# Altium PCB PCB_MCP2515_2022-08-01.pcbdoc
Units mil, origin at the board's own origin, x right, y up, seen from the top; angles counter-clockwise.
Board outline 3209.33 x 2315 mil, 2 copper layers (Top Layer, Bottom Layer); 14 components, 30 nets, 76 pads, 16 vias.
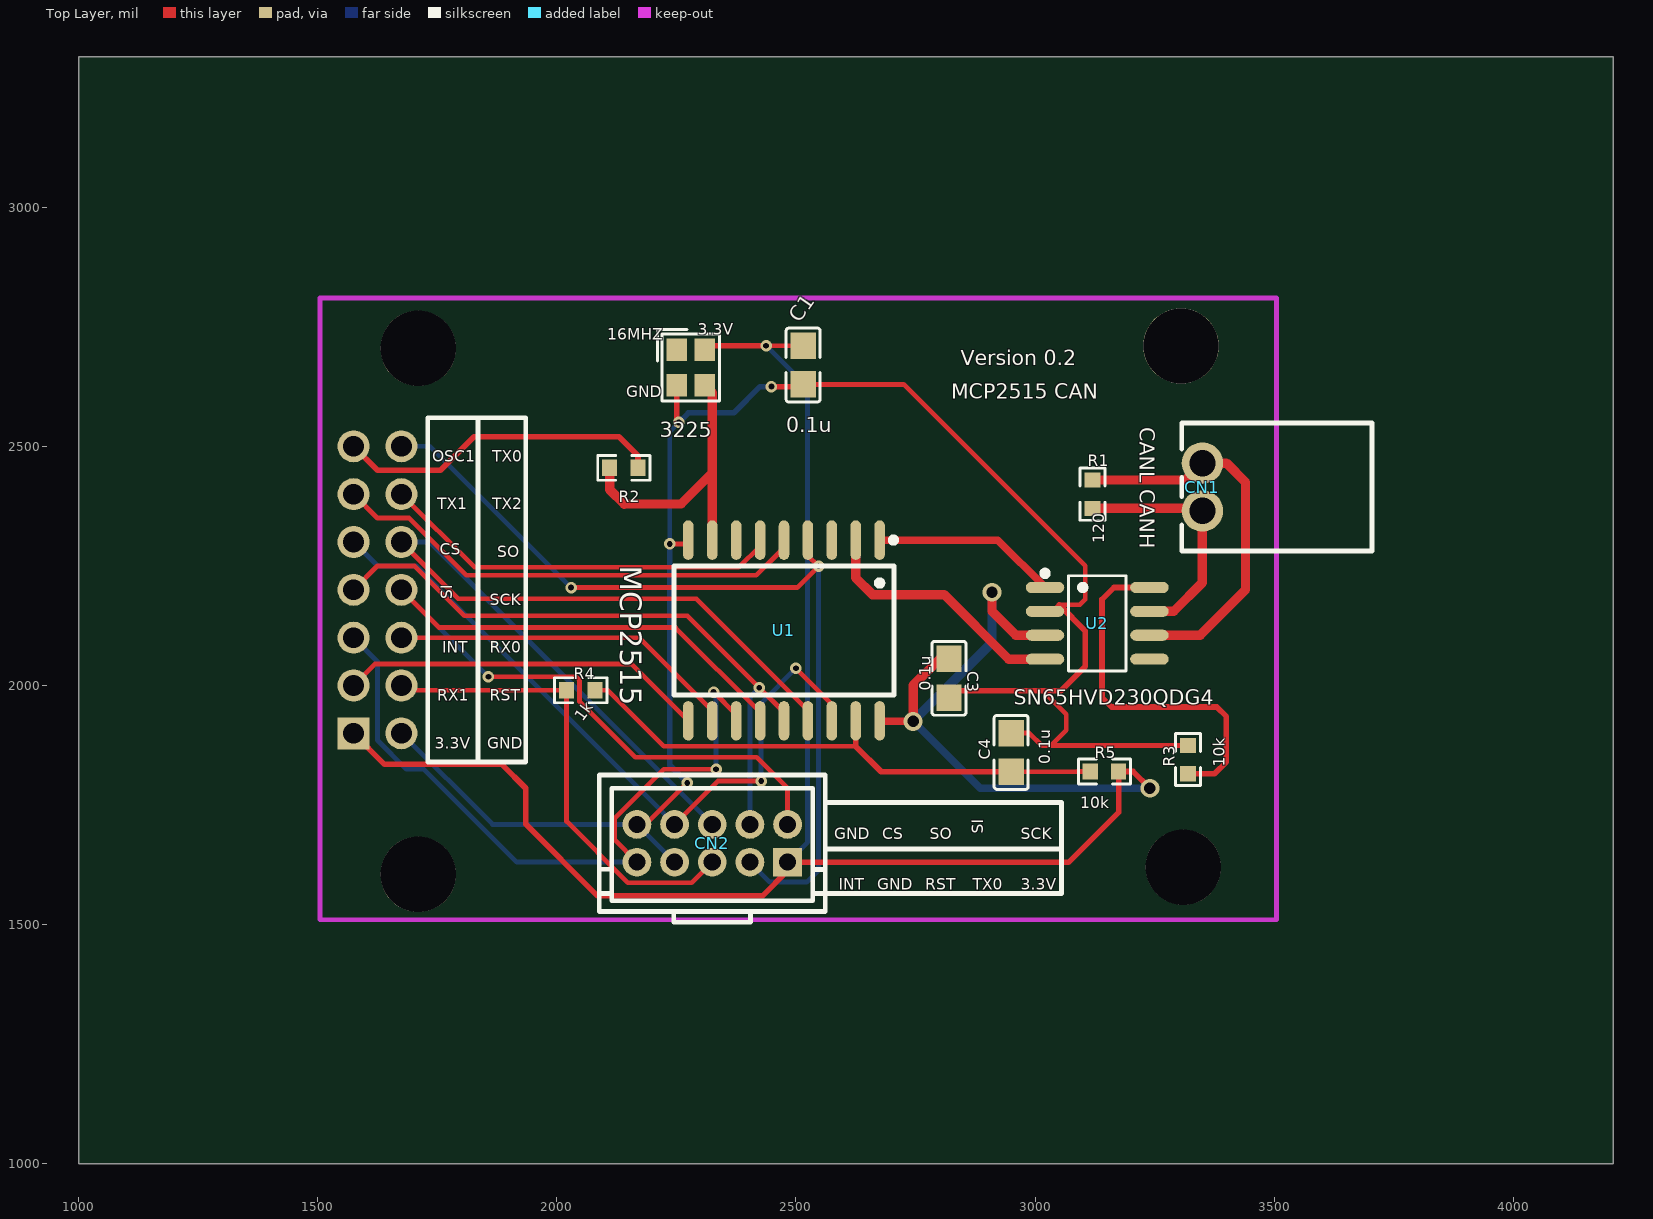
[diagram p0: Top Layer view]
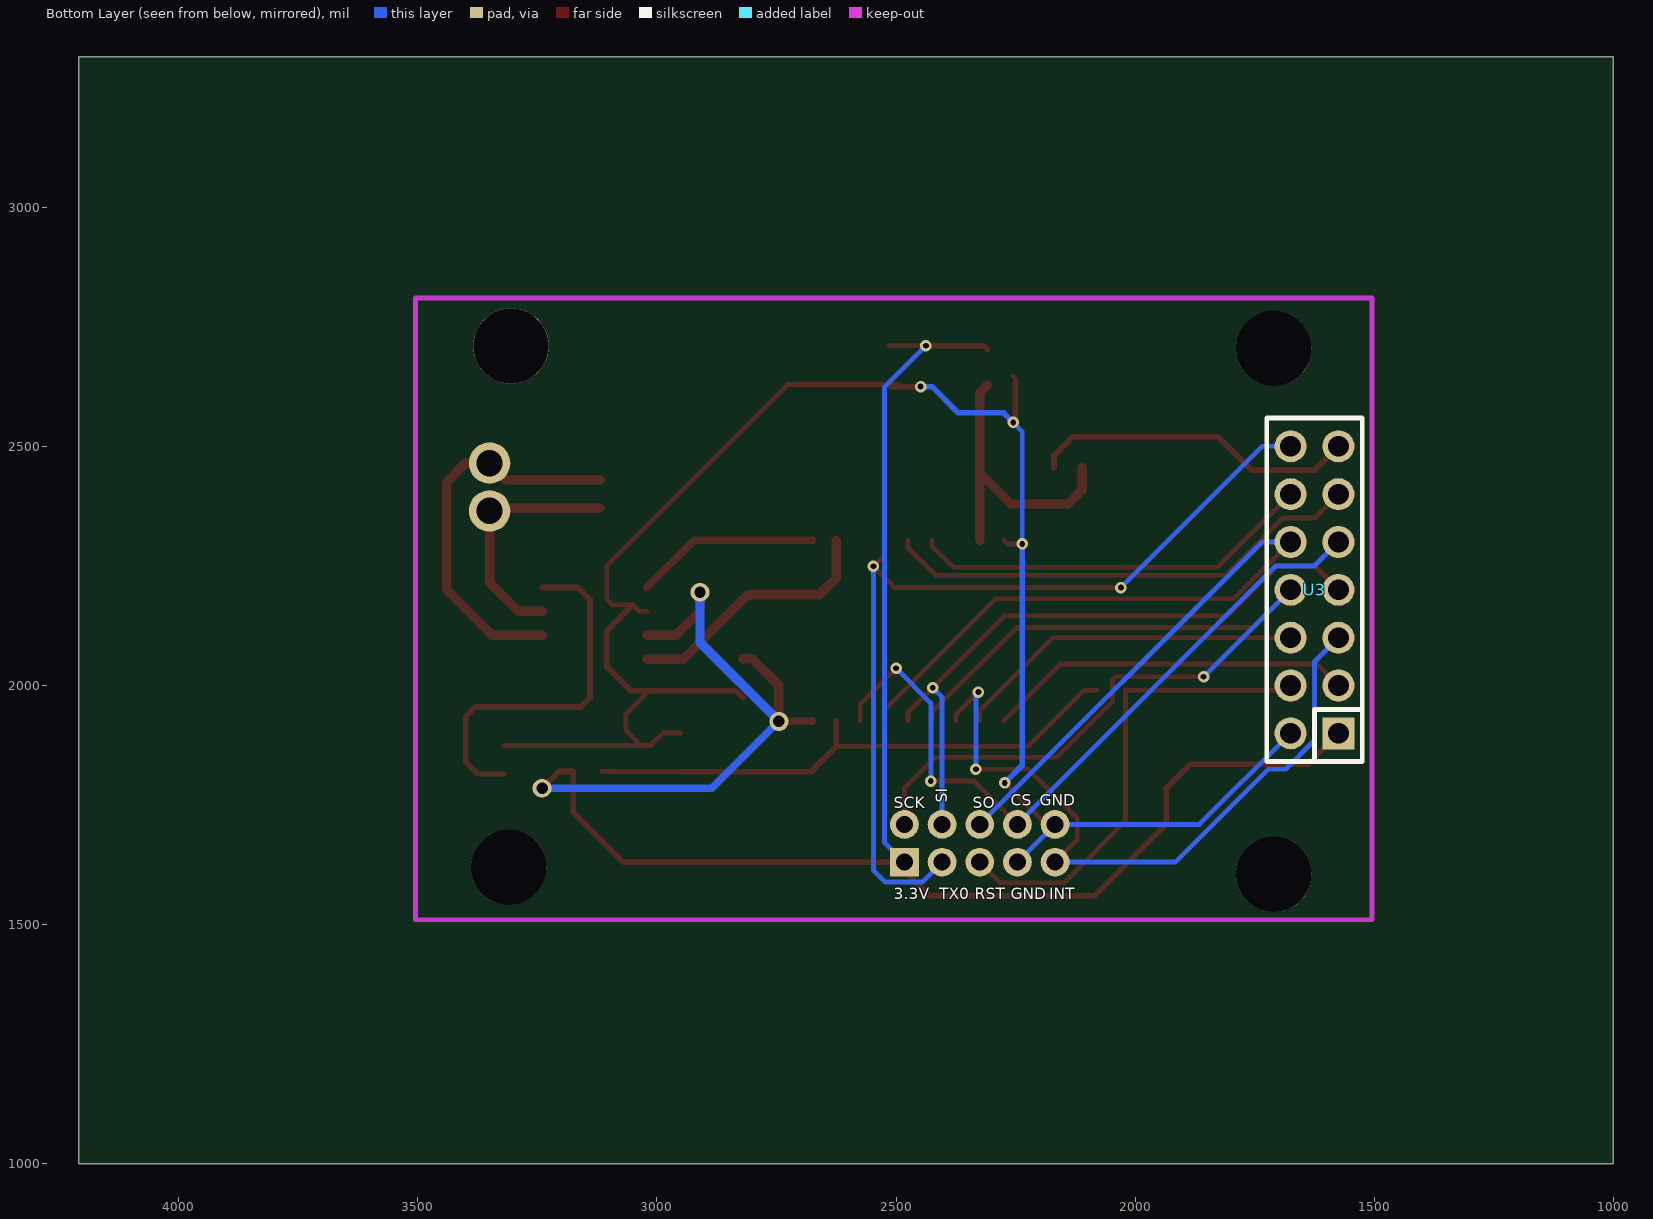
[diagram p1: Bottom Layer view, seen from below]

## Layer stack, top to bottom
Top Layer: signal copper (thickness not stored)
Dielectric: dielectric 12.6, FR-4, Dk 4.8
Bottom Layer: signal copper (thickness not stored)

## Board outline
4209.33,1000 1000,1000 1000,3315 4209.33,3315

## Components (designator, comment, footprint, x,y, rotation, side; value= is the part's Value field where it differs from the comment)
3225 "16MHz" OSC-SMD_4P-L2.5-W2.0-BL 2280,2665 r270 top
C1 "0.1u" C0805 2515,2670 r270 top
C3 "0.1u" C0805 2820,2015 r270 top
C4 "0.1u" C0805 2950,1860 r90 top
CN1 "JL15EDGRC-25002G01" CONN-TH_JL15EDGRC-25002G01 3350,2415 r90 top
CN2 "PHB-2*5A_C722806" CONN-TH_PHB-2X5A 2325,1670 r0 top
R1 "120" R0603 3120,2400 r90 top
R2 "0" R0603 2140,2455 r0 top
R3 "10k" R0603 3320,1845 r90 top
R4 "1k" R0603 2050,1990 r0 top
R5 "10k" R0603 3145,1820 r0 top
U1 "MCP2515" SOIC-18_L11.6-W7.5-P1.27-LS10.3-BL 2475,2115 r180 top
U2 "SN65HVD230QDG4" SOIC-8_L4.9-W3.9-P1.27-LS6.0-BL 3130,2130 r270 top
U3 "PZ254-2-07-Z-8.5KK" HDR-TH_14P-P2.54-V-M-R2-C7-S2.54 1625,2200 r270 bottom

## Footprints (in the part's own frame and the unit in brackets; to place one, negate y for a bottom-side part, rotate by r counter-clockwise, add the part's x,y. Pads: shape width x height; smd on the part's side, far side on the other; paste and mask are expansions set on the pad)
C0805 [mm]
  rect 1.41x1.35 smd: 1(-1.03,0) 2(1.03,0)
  silkscreen extent -1.96,-0.9 1.96,0.9
CONN-TH_JL15EDGRC-25002G01 [mm]
  round 2.2 hole 1.4: 1(-1.27,0) 2(1.27,0)
  silkscreen extent -3.4,-9 3.4,1.1
CONN-TH_PHB-2X5A [mil]
  rect 60x60 hole 36: 1(157.48,-39.37)
  round 60 hole 36: 2(157.48,39.37) 3(78.74,-39.37) 4(78.74,39.37) 5(0,-39.37) 6(0,39.37) 7(-78.74,-39.37) 8(-78.74,39.37) 9(-157.48,-39.37) 10(-157.48,39.37)
  silkscreen extent -236,-165 236,143
HDR-TH_14P-P2.54-V-M-R2-C7-S2.54 [mm]
  rect 1.7x1.7 hole 1.1: 1(7.62,1.27)
  round 1.7 hole 1.1: 2(7.62,-1.27) 3(5.08,1.27) 4(5.08,-1.27) 5(2.54,1.27) 6(2.54,-1.27) 7(0,1.27) 8(0,-1.27) 9(-2.54,1.27) 10(-2.54,-1.27) 11(-5.08,1.27) 12(-5.08,-1.27) 13(-7.62,1.27) 14(-7.62,-1.27)
  silkscreen extent -9.12,-2.54 9.12,2.54
OSC-SMD_4P-L2.5-W2.0-BL [mm]
  rect 1.2x1.1 smd: 1(-0.95,-0.75) 2(0.95,-0.75) 3(0.95,0.75) 4(-0.95,0.75)
  silkscreen extent -2.01,-1.76 1.78,1.53
R0603 [mil]
  rect 31.75x34.02 smd: 1(-29.66,0) 2(29.66,0)
  silkscreen extent -55,-26 55,26
SOIC-8_L4.9-W3.9-P1.27-LS6.0-BL [mm]
  oval 0.588x2.045 smd: 1(-1.905,-2.773) 2(-0.635,-2.773) 3(0.635,-2.773) 4(1.905,-2.773) 5(1.905,2.773) 6(0.635,2.773) 7(-0.635,2.773) 8(-1.905,2.773)
  silkscreen extent -2.8,-2.92 2.53,1.52
SOIC-18_L11.6-W7.5-P1.27-LS10.3-BL [mm]
  oval 0.56x2.1 smd: 1(-5.08,-4.8) 2(-3.81,-4.8) 3(-2.54,-4.8) 4(-1.27,-4.8) 5(0,-4.8) 6(1.27,-4.8) 7(2.54,-4.8) 8(3.81,-4.8) 9(5.08,-4.8) 10(5.08,4.8) 11(3.81,4.8) 12(2.54,4.8) 13(1.27,4.8) 14(0,4.8) 15(-1.27,4.8) 16(-2.54,4.8) 17(-3.81,4.8) 18(-5.08,4.8)
  silkscreen extent -5.96,-4.95 5.84,3.43

## Free pads (board coordinates)
  round 157.48 hole 157.48 unplated: ""(1710,1605) ""(1710,2705) ""(3305,2710) ""(3310,1620)

## Via types
v1: diameter 24.02, hole 12.01, Top Layer to Bottom Layer, tented both sides, 13 vias
v2: diameter 39.37, hole 23.62, Top Layer to Bottom Layer, tented both sides, 3 vias

## Nets (pads, with @x,y where several pads share a name; then routed paths per layer and width w, separated by ;. In a path a pad name is that pad's centre, name@x,y a point inside that pad or via, vN(x,y) a via of type N, cw(c..) or ccw(c..) an arc to the next point about the centre after c; other vN are vias at no path point)
CANCS: CN2.8 U1.16 U3.9 | length 1541.8
  Top Layer w10: CN2.8 2336.89,1800 v1(2427.19,1800) ; v1(2500.01,2036.13) 2575,1961.14 U1.16
  Bottom Layer w10: U3.9 1625,2250 1705.63,2250 CN2.8 ; v1(2427.19,1800) 2427.19,1963.31 v1(2500.01,2036.13)
CANINT: CN2.9 U1.12 U3.5 | length 1491.7
  Top Layer w10: CN2.9 2121.17,1676.98 2121.17,1722.35 2223.85,1825.03 v1(2332.89,1825.03) ; v1(2327.76,1986.32) 2375,1939.08 U1.12
  Bottom Layer w10: U3.5 1625,2050 1625,1885.62 1685.62,1825 1722,1825 1916.37,1630.63 CN2.9 ; v1(2327.76,1986.32) 2332.89,1981.19 v1(2332.89,1825.03)
CANREST: CN2.5 R4.1 U3.4 | length 999.3
  Top Layer w10: U3.4 1685,1990 R4.1 2020.34,1715.77 2148.53,1587.58 2281.95,1587.58 CN2.5
CANSCK: CN2.2 U1.13 U3.8 | length 1955.6
  Top Layer w10: U3.8 1753.83,2121.17 2248,2121.17 2425,1944.17 U1.13 ; v1(1856.93,2018.07) 2040.79,2018.07 2047.27,2011.59 2047.27,1966.74 2163.96,1850.05 2417.69,1850.05 2482.48,1785.26 CN2.2
  Bottom Layer w10: U3.8 v1(1856.93,2018.07)
CANSI: CN2.4 U1.14 U3.7 | length 1359.4
  Top Layer w10: U3.7 1625,2250 1702.29,2250 1806.59,2145.7 2273.05,2145.7 v1(2423.41,1995.34) 2475,1943.75 U1.14
  Bottom Layer w10: CN2.4 2403.74,1975.67 v1(2423.41,1995.34)
CANSO: CN2.6 U1.15 U3.10 | length 1912.7
  Top Layer w10: U3.10 1793.45,2181.55 2291.89,2181.55 2525,1948.44 U1.15
  Bottom Layer w10: U3.10 1734.37,2300 CN2.6
DC3.3V: 3225.4 C1.1 C3.1 CN2.1 R5.2 U1.18 U2.3 U3.1 | length 4681
  Top Layer w10: v1(2437.63,2710.55) C1.1
  Top Layer w11.81: U3.1 1640,1835 1885,1835 1935,1785 1935,1710 2085,1560 2430,1560 2482.48,1612.48 CN2.1 ; 3225.4 2317.68,2710.55 v1(2437.63,2710.55) ; CN2.1 3070,1630 3174.7,1734.7 R5.2 ; R5.2 3205,1820 v2(3240,1785)
  Top Layer w15.75: U1.18 2676.02,1925 v2(2745,1925)
  Top Layer w19.68: v2(2745,1925) 2745,2000 2800.5,2055.5 C3.1@2820,2055.5 ; v2(2910,2195) 2910,2155 2960,2105 U2.3
  Bottom Layer w10: v1(2437.63,2710.55) 2524.2,2623.98 2524.2,1672.35 CN2.1
  Bottom Layer w15.75: v2(2745,1925) 2885,1785 v2(3240,1785)
  Bottom Layer w19.68: v2(2745,1925) 2910,2090 v2(2910,2195)
GND: 3225.2 C1.2 C3.2 C4.2 CN2.7 CN2.10 R3.2 U1.9 U2.2 U3.2 | length 3964.4
  Top Layer w10: CN2.10 2186.05,1709.37 v1(2272.87,1796.19) ; v1(2235.98,2296.05) 2267.07,2296.05 U1.9 ; 3225.2 2250.47,2641.26 3225.2@2255.47,2646.26 ; C1.2@2496.22,2629.45 C1.2 ; C1.2@2515,2629.5 2725.5,2629.5 3105,2250 3105,2180 3093.7,2168.7 3050.5,2168.7 ; C4.2 2963.78,1900.55 2987.57,1900.55 3013.46,1874.66 R3.2 ; 3017.78,1989.1 3017.78,1987.22 3065,1940 3065,1906.16 3033.5,1874.66 ; U2.2 3036.78,2155 3050.47,2168.69
  Top Layer w11.81: 3225.2 2250.47,2554.53 v1(2255,2550) ; v1(2448.76,2624.93) 2510.48,2624.93 C1.2 ; C3.2 2834.65,1989.1 2970,1989.1 ; 2963.8,1989.1 3054.1,1989.1 3105,2040 3105,2114.2 3050.5,2168.7
  Bottom Layer w10: U3.2 1865.63,1709.37 CN2.10 CN2.7 ; v1(2235.98,2296.05) 2235.98,2530.98 v1(2255,2550)
  Bottom Layer w11.81: v1(2235.98,2296.05) 2235.98,1833.08 v1(2272.87,1796.19) ; v1(2255,2550) 2275,2570 2370,2570 2424.93,2624.93 v1(2448.76,2624.93)
OSCCLK: R2.2 U3.13 | length 686.1
  Top Layer w11.81: U3.13 1625,2450 1756.9,2450 1826.9,2520 2130,2520 2169.7,2480.3 R2.2
RX0BF: U1.11 U3.6 | length 734.6
  Top Layer w10: U3.6 2172.37,2100 2325,1947.37 U1.11
RX1BF: U1.10 U3.3 | length 767.6
  Top Layer w10: U3.3 1619.63,2044.63 2156.39,2044.63 U1.10
S$2465: 
S$4877: 
S$8133: 
S$8137: 
S$8141: 
S$8145: 
S$9003: 
S$9007: 
S$9044: 
TX0RTS: CN2.3 U1.4 U3.14 | length 1883.7
  Top Layer w10: v1(2029.74,2204.61) 2502.83,2204.61 v1(2547.26,2249.04) 2525,2271.3 U1.4
  Bottom Layer w10: U3.14 1734.35,2500 v1(2029.74,2204.61) ; CN2.3 2445.59,1588.78 2522.33,1588.78 2547.26,1613.71 v1(2547.26,2249.04)
TX1RTS: U1.5 U3.11 | length 1009.9
  Top Layer w10: U3.11 1625,2350 1690.98,2350 1810.55,2230.43 2417.17,2230.43 2475,2288.26 U1.5
TX2RTS: U1.6 U3.12 | length 844.2
  Top Layer w10: U3.12 1827.9,2247.1 2380.59,2247.1 2425,2291.51 U1.6
U1_1: U1.1 U2.1 | length 386.8
  Top Layer w15.75: U1.1 2921.87,2303.98 U2.1
U1_2: U1.2 U2.4 | length 545.3
  Top Layer w19.68: U1.2 2625,2225 2660,2190 2775,2190 2810,2190 2945,2055 U2.4
U1_8: 3225.3 R2.1 U1.8 | length 630.8
  Top Layer w19.68: R2.1 2110.3,2409.7 2141.1,2378.9 2260,2380 2325,2445 2325,2446.04 ; 3225.3 2325,2612.13 U1.8
U1_17: C4.1 R4.2 R5.1 U1.17 | length 1159.8
  Top Layer w10: R4.2 2106.52,1990 2223.78,1872.74 2625,1872.74 ; C4.1 3087.93,1819.45 3088.48,1820 R5.1
  Top Layer w11.81: U1.17 2625,1872.74 2678.29,1819.45 C4.1
U2_6: CN1.2 R1.2 U2.6 | length 826.5
  Top Layer w10: CN1.2@3341.39,2461.39 3345,2465 CN1.2
  Top Layer w19.68: R1.2 3314.66,2429.66 CN1.2 3400,2465 3440,2425 3440,2200 3345,2105 U2.6
U2_7: CN1.1 R1.1 U2.7 | length 527.6
  Top Layer w10: CN1.1@3342.33,2370 3347.33,2365 CN1.1
  Top Layer w19.68: R1.1 3344.66,2370.34 CN1.1 3350,2215 3290,2155 U2.7
U2_8: R3.1 U2.8 | length 776.3
  Top Layer w11.81: U2.8 3165,2205 3140,2180 3140,1975 3160,1955 3380,1955 3400,1935 3400,1840 3375.34,1815.34 R3.1
pads on no net: 3225.1 U1.3 U1.7 U2.5

## Silkscreen, mask and mechanical layers (free items; w line width, h text height)
Top Overlay:
  lines w10 net S$2465: 1730,2560 1935,2560 1935,1840 1730,1840 1835,1840 1835,2560
  lines w10 net S$4877: 1730,1840 1730,2560
  lines w10 net S$8133: 2561.22,1574.18 2561.22,1735.18
  lines w10 net S$8137: 2561.22,1565 3045,1565
  lines w10 net S$8141: 2561.2,1755.2 3055,1755.2 3055,1565 3045,1565
  lines w10 net S$8145: 2561.22,1658.18 3050,1658.18
  text "3.3V" at 2295,2733.19 h23.62
  text "16MHZ" at 2105,2723.19 h23.62
  text "Version 0.2" at 2845,2669.25 h31.5
  text "GND" at 2145,2603.19 h23.62
  text "MCP2515 CAN" at 2825,2599.25 h31.5
  text "CANL" at 3219.25,2540 h31.5 r270
  text "OSC1" at 1740,2468.19 h23.62
  text "TX0" at 1865,2468.19 h23.62
  text "CANH" at 3219.25,2410 h31.5 r270
  text "TX1" at 1750,2368.19 h23.62
  text "TX2" at 1865,2368.19 h23.62
  text "CS" at 1755,2273.19 h23.62
  text "SO" at 1875,2268.19 h23.62
  text "SI" at 1781.81,2180 h23.62 r90
  text "SCK" at 1860,2168.19 h23.62
  text "INT" at 1760,2068.19 h23.62
  text "RX0" at 1860,2068.19 h23.62
  text "RX1" at 1750,1968.19 h23.62
  text "RST" at 1860,1968.19 h23.62
  text "3.3V" at 1745,1868.19 h23.62
  text "GND" at 1855,1868.19 h23.62
  text "SI" at 2891.81,1690 h23.62 r90
  text "GND" at 2580,1678.19 h23.62
  text "CS" at 2680,1678.19 h23.62
  text "SO" at 2780,1678.19 h23.62
  text "SCK" at 2970,1678.19 h23.62
  text "INT" at 2590,1573.19 h23.62
  text "GND" at 2670,1573.19 h23.62
  text "RST" at 2770,1573.19 h23.62
  text "TX0" at 2870,1573.19 h23.62
  text "3.3V" at 2970,1573.19 h23.62
Bottom Overlay:
  text "SI" at 2393.19,1755 h23.62 r270
  text "GND" at 2200,1748.19 h23.62
  text "CS" at 2260,1748.19 h23.62
  text "SO" at 2340,1743.19 h23.62
  text "SCK" at 2505,1743.19 h23.62
  text "INT" at 2180,1553.19 h23.62
  text "GND" at 2260,1553.19 h23.62
  text "RST" at 2335,1553.19 h23.62
  text "TX0" at 2410,1553.19 h23.62
  text "3.3V" at 2505,1553.19 h23.62